# Altium PCB RX_Board.PcbDoc (part 3 of 5)
Units mm, origin at the board's own origin, x right, y up, seen from the top; angles counter-clockwise.
Board outline 69 x 69 mm, 4 copper layers (Top Layer, Int1 (GND), Int2 (GND), Bottom Layer), stack 1.586 mm thick; 118 components, 59 nets, 325 pads, 477 vias.
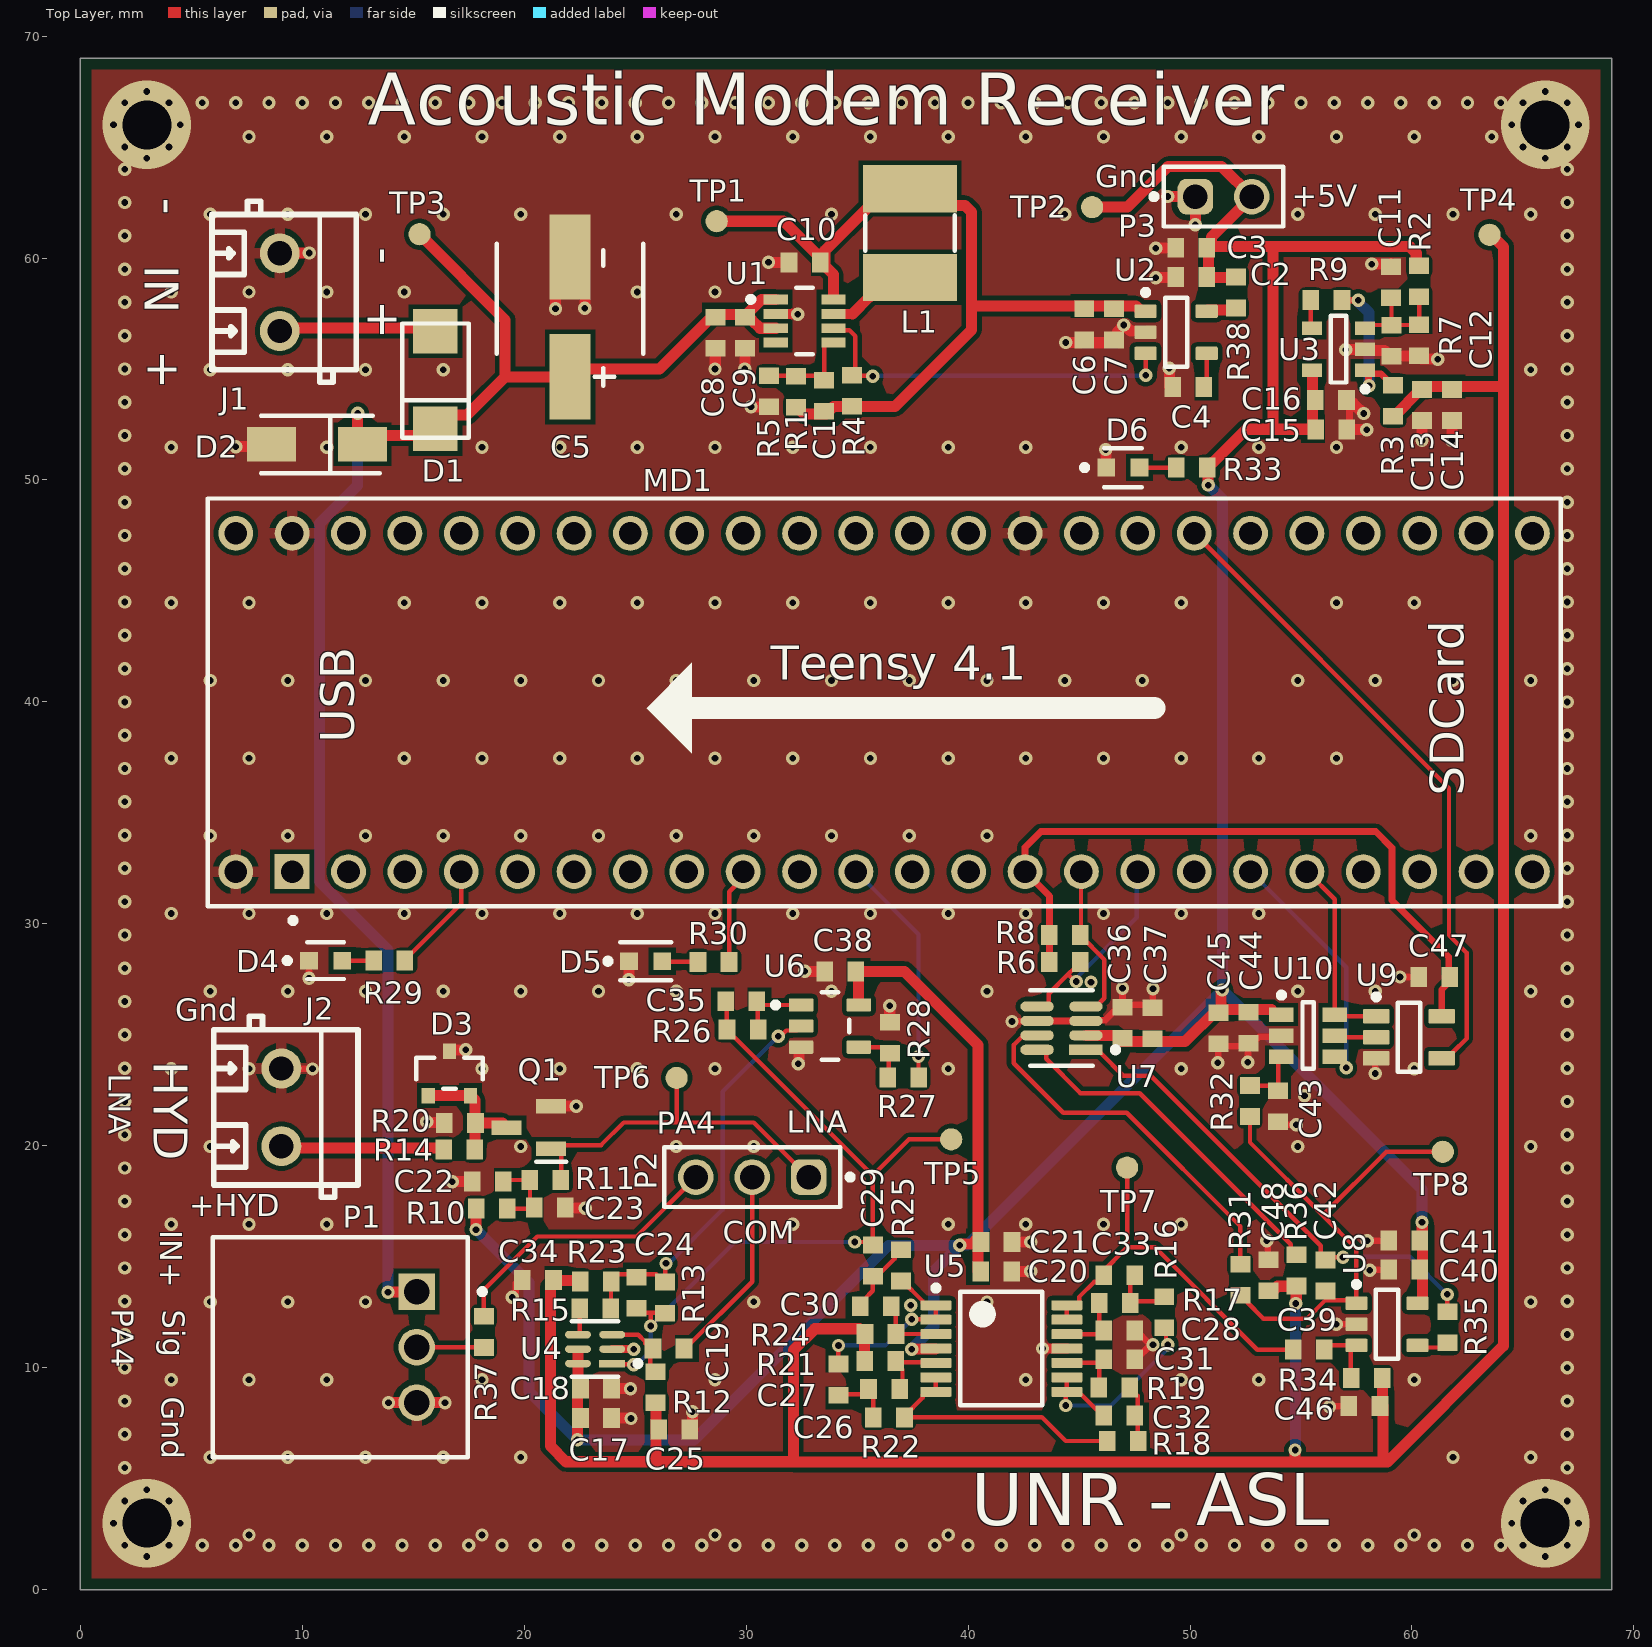
[diagram p0: Top Layer view]

## Part data (continued)
R1: library part RT0603BRD07560KL, "100mW Thin Film Resistor 75V ±25ppm/℃ ±0.1% 560kΩ 0603 Chip Resistor - Surface Mount ROHS", Case Code (Imperial)=0603, Case Code (Metric)=1608, JLCPCB Part Number=C719312, Manufacturer="Yageo Group", Max Operating Temperature=155°C, Max Power Dissipation=100mW, Min Operating Temperature=-55°C, Temperature Coefficient=25ppm/°C, Tolerance=0.1%, Voltage Rating=75V, Case/Package=0603, Category="Chip SMD Resistors", China RoHS=Non-Compliant, ComponentLink1Description=https://datasheet.octopart.com:443/RT0603BRD07560KL-Yageo-datasheet-176402239.pdf?src-supplier=Future+Electronics, ComponentLink1URL=https://datasheet.octopart.com:443/RT0603BRD07560KL-Yageo-datasheet-176402239.pdf?src-supplier=Future+Electronics, ComponentLink2Description=https://datasheet.octopart.com:443/RT0603BRD07560KL-Yageo-datasheet-169971040.pdf?src-supplier=Future+Electronics, ComponentLink2URL=https://datasheet.octopart.com:443/RT0603BRD07560KL-Yageo-datasheet-169971040.pdf?src-supplier=Future+Electronics, ComponentLink3Description=https://datasheet.octopart.com:443/RT0603BRD07560KL-Yageo-datasheet-166250672.pdf?src-supplier=Future+Electronics, ComponentLink3URL=https://datasheet.octopart.com:443/RT0603BRD07560KL-Yageo-datasheet-166250672.pdf?src-supplier=Future+Electronics, ComponentLink4Description=https://datasheet.octopart.com:443/RT0603BRD07560KL-Yageo-datasheet-96443642.pdf?src-supplier=Upverter, ComponentLink4URL=https://datasheet.octopart.com:443/RT0603BRD07560KL-Yageo-datasheet-96443642.pdf?src-supplier=Upverter, ComponentLink5Description=https://datasheet.octopart.com:443/RT0603BRD07560KL-Yageo-Group-datasheet-141265893.pdf?src-supplier=ODG+(Origin+Data+Global), ComponentLink5URL=https://datasheet.octopart.com:443/RT0603BRD07560KL-Yageo-Group-datasheet-141265893.pdf?src-supplier=ODG+(Origin+Data+Global), ComponentLink6Description=https://datasheet.octopart.com/RT0603BRD07560KL-Yageo-datasheet-86813807.pdf, ComponentLink6URL=https://datasheet.octopart.com/RT0603BRD07560KL-Yageo-datasheet-86813807.pdf, ComponentLink7Description=http://sigma.octopart.com:80/conflict_mineral_statement/Yageo-company-3.pdf?src-supplier=Compliance+Statements, ComponentLink7URL=http://sigma.octopart.com:80/conflict_mineral_statement/Yageo-company-3.pdf?src-supplier=Compliance+Statements, ComponentLink8Description=http://sigma.octopart.com:80/rohs_statement/Yageo-company-2.pdf?src-supplier=Compliance+Statements, ComponentLink8URL=http://sigma.octopart.com:80/rohs_statement/Yageo-company-2.pdf?src-supplier=Compliance+Statements, Composition="Thin Film", Contact Plating=Tin, Country of Origin="Mainland China, Taiwan", Export Control Classification Number (ECCN) Code=EAR99, Features="Moisture Resistant", Harmonized Tariff Schedule (HTS) Code=8533.21.00.30, Height=450µm, Introduction Date=2008-07-11, Length=1.6mm, Lifecycle Status=Production, Manufacturer Part Number=RT0603BRD07560KL, Mounting Technology="Surface Mount", Number of Terminals=2, Number of Terminations=2, Packaging="Tape & Reel", Power Rating=100mW, Pricing="10=0.061, 20=0.06, 30=0.059, 50=0.058, 100=0.057, 250=0.054, 500=0.051, 1000=0.05 (USD)", Radiation Hardening=No, REACH SVHC=Unaffected, RoHS=Compliant, Schedule B="8533210045, 8533210045|8533210045|8533210045|8533210045|8533210045", Stock=4440, Supplier=Newark, Supplier Part Number=RT0603BRD07560KL, Termination=SMD/SMT, Width=800µm, Working Voltage=75V
R2 R7 R12 R34 R35: library part RT0603BRD0710KL, "Res Thin Film 0603 10K Ohm 0.1% 1/10W", Case Code (Imperial)=0603, JLCPCB Part Number=C95204, Manufacturer="Yageo Group", Max Operating Temperature=155°C, Max Power Dissipation=100mW, Min Operating Temperature=-55°C, Temperature Coefficient=25ppm/°C, Tolerance=0.1%, Voltage Rating=75V, Case/Package=0603, Category="Chip SMD Resistors", China RoHS=Non-Compliant, ComponentLink1Description=https://datasheet.octopart.com:443/RT0603BRD0710KL-Yageo-datasheet-176402239.pdf?src-supplier=Future+Electronics, ComponentLink1URL=https://datasheet.octopart.com:443/RT0603BRD0710KL-Yageo-datasheet-176402239.pdf?src-supplier=Future+Electronics, ComponentLink2Description=https://datasheet.octopart.com:443/RT0603BRD0710KL-Yageo-datasheet-169971040.pdf?src-supplier=Future+Electronics, ComponentLink2URL=https://datasheet.octopart.com:443/RT0603BRD0710KL-Yageo-datasheet-169971040.pdf?src-supplier=Future+Electronics, ComponentLink3Description=https://datasheet.octopart.com:443/RT0603BRD0710KL-Yageo-datasheet-166250672.pdf?src-supplier=Future+Electronics, ComponentLink3URL=https://datasheet.octopart.com:443/RT0603BRD0710KL-Yageo-datasheet-166250672.pdf?src-supplier=Future+Electronics, ComponentLink4Description=https://datasheet.octopart.com:443/RT0603BRD0710KL-Yageo-datasheet-136673517.pdf?src-supplier=Future+Electronics, ComponentLink4URL=https://datasheet.octopart.com:443/RT0603BRD0710KL-Yageo-datasheet-136673517.pdf?src-supplier=Future+Electronics, ComponentLink5Description=https://datasheet.octopart.com:443/RT0603BRD0710KL-Yageo-datasheet-137700930.pdf?src-supplier=Future+Electronics, ComponentLink5URL=https://datasheet.octopart.com:443/RT0603BRD0710KL-Yageo-datasheet-137700930.pdf?src-supplier=Future+Electronics, ComponentLink6Description=https://datasheet.octopart.com:443/RT0603BRD0710KL-Yageo-datasheet-12594463.pdf?src-supplier=Future+Electronics, ComponentLink6URL=https://datasheet.octopart.com:443/RT0603BRD0710KL-Yageo-datasheet-12594463.pdf?src-supplier=Future+Electronics, ComponentLink7Description=https://datasheet.octopart.com:443/RT0603BRD0710KL-Yageo-datasheet-8324589.pdf?src-supplier=Future+Electronics, ComponentLink7URL=https://datasheet.octopart.com:443/RT0603BRD0710KL-Yageo-datasheet-8324589.pdf?src-supplier=Future+Electronics, ComponentLink8Description=https://datasheet.octopart.com:443/RT0603BRD0710KL-Yageo-datasheet-34924148.pdf?src-supplier=Future+Electronics, ComponentLink8URL=https://datasheet.octopart.com:443/RT0603BRD0710KL-Yageo-datasheet-34924148.pdf?src-supplier=Future+Electronics, ComponentLink9Description=https://datasheet.octopart.com:443/RT0603BRD0710KL-Yageo-datasheet-10915759.pdf?src-supplier=Upverter, ComponentLink9URL=https://datasheet.octopart.com:443/RT0603BRD0710KL-Yageo-datasheet-10915759.pdf?src-supplier=Upverter, ComponentLink10Description=https://datasheet.octopart.com:443/RT0603BRD0710KL-Yageo-datasheet-96443642.pdf?src-supplier=Upverter, ComponentLink10URL=https://datasheet.octopart.com:443/RT0603BRD0710KL-Yageo-datasheet-96443642.pdf?src-supplier=Upverter, ComponentLink11Description=https://datasheet.octopart.com:443/RT0603BRD0710KL-Yageo-Group-datasheet-188167888.pdf?src-supplier=LCSC, ComponentLink11URL=https://datasheet.octopart.com:443/RT0603BRD0710KL-Yageo-Group-datasheet-188167888.pdf?src-supplier=LCSC, ComponentLink12Description=https://datasheet.octopart.com:443/RT0603BRD0710KL-Yageo-datasheet-164439670.pdf?src-supplier=Newark, ComponentLink12URL=https://datasheet.octopart.com:443/RT0603BRD0710KL-Yageo-datasheet-164439670.pdf?src-supplier=Newark, ComponentLink13Description=https://datasheet.octopart.com:443/RT0603BRD0710KL-Yageo-Group-datasheet-141265893.pdf?src-supplier=ODG+(Origin+Data+Global), ComponentLink13URL=https://datasheet.octopart.com:443/RT0603BRD0710KL-Yageo-Group-datasheet-141265893.pdf?src-supplier=ODG+(Origin+Data+Global), ComponentLink14Description=https://datasheet.octopart.com:443/RT0603BRD0710KL-Yageo-datasheet-120102479.pdf?src-supplier=Megastar, ComponentLink14URL=https://datasheet.octopart.com:443/RT0603BRD0710KL-Yageo-datasheet-120102479.pdf?src-supplier=Megastar, ComponentLink15Description=https://datasheet.octopart.com/RT0603BRD0710KL-Yageo-datasheet-86813807.pdf, ComponentLink15URL=https://datasheet.octopart.com/RT0603BRD0710KL-Yageo-datasheet-86813807.pdf, ComponentLink16Description=http://sigma.octopart.com:80/conflict_mineral_statement/Yageo-company-3.pdf?src-supplier=Compliance+Statements, ComponentLink16URL=http://sigma.octopart.com:80/conflict_mineral_statement/Yageo-company-3.pdf?src-supplier=Compliance+Statements, ComponentLink17Description=http://sigma.octopart.com:80/rohs_statement/Yageo-company-2.pdf?src-supplier=Compliance+Statements, ComponentLink17URL=http://sigma.octopart.com:80/rohs_statement/Yageo-company-2.pdf?src-supplier=Compliance+Statements, Composition="Thin Film", Country of Origin="Mainland China, Taiwan", Depth=800µm, Export Control Classification Number (ECCN) Code=EAR99, Features="Moisture Resistant", Harmonized Tariff Schedule (HTS) Code=8533.21.00.30, Height=450µm, Introduction Date=2008-06-09, Lead Free="Lead Free", Length=1.6mm, Lifecycle Status=Production, Manufacturer Part Number=RT0603BRD0710KL, Military Standard=Not, Mounting Technology="Surface Mount", Number of Terminals=2, Number of Terminations=2, Power Rating=100mW, Pricing="1=0.127, 25=0.079, 100=0.075, 250=0.07, 500=0.066, 1000=0.064, 2500=0.059 (USD)", REACH SVHC=Unaffected, RoHS=Compliant, Schedule B="8533210045, 8533210045|8533210045, 8533210045|8533210045|8533210045, 8533210045|8533210045|8533210045|8533210045", Stock=34896, Supplier=Avnet, Supplier Part Number=RT0603BRD0710KL, Termination=SMD/SMT, Voltage Rating (DC)=75V, Weight=2.012816mg, Width=800µm, Working Voltage=75V
R3: library part 0603WAF100JT5E, "Res Thick Film 0603 10 Ohm 1% 0.1W(1/10W) ±200ppm/C Pad SMD T/R", JLCPCB Part Number=C22859, Manufacturer="Royal Ohm", Supplier Part Number=303-0603WAF100JT5E, Category="Chip SMD Resistors", ComponentLink1Description=https://datasheet.octopart.com:443/0603WAF100JT5E-Royal-Ohm-datasheet-165785611.pdf?src-supplier=TME, ComponentLink1URL=https://datasheet.octopart.com:443/0603WAF100JT5E-Royal-Ohm-datasheet-165785611.pdf?src-supplier=TME, ComponentLink2Description=https://datasheet.octopart.com:443/0603WAF100JT5E-Royal-Ohm-datasheet-157855877.pdf?src-supplier=TME, ComponentLink2URL=https://datasheet.octopart.com:443/0603WAF100JT5E-Royal-Ohm-datasheet-157855877.pdf?src-supplier=TME, ComponentLink3Description=https://datasheet.octopart.com:443/0603WAF100JT5E-Royal-Ohm-datasheet-62069544.pdf?src-supplier=TME, ComponentLink3URL=https://datasheet.octopart.com:443/0603WAF100JT5E-Royal-Ohm-datasheet-62069544.pdf?src-supplier=TME, Manufacturer Part Number=0603WAF100JT5E, Pricing="10000=0.001 (USD)", Stock=15000, Supplier=Mouser
R4 R5 R20 R28: library part RT0603BRD07100KL, "100mW Thin Film Resistor 75V ±25ppm/℃ ±0.1% 100kΩ 0603 Chip Resistor - Surface Mount ROHS", Case Code (Imperial)=0603, JLCPCB Part Number=C122538, Manufacturer="Yageo Group", Max Operating Temperature=155°C, Max Power Dissipation=100mW, Min Operating Temperature=-55°C, Temperature Coefficient=25ppm/°C, Tolerance=0.1%, Voltage Rating=75V, Case/Package=0603, Category="Chip SMD Resistors", China RoHS=Non-Compliant, ComponentLink1Description=https://datasheet.octopart.com:443/RT0603BRD07100KL-Yageo-datasheet-176402239.pdf?src-supplier=Future+Electronics, ComponentLink1URL=https://datasheet.octopart.com:443/RT0603BRD07100KL-Yageo-datasheet-176402239.pdf?src-supplier=Future+Electronics, ComponentLink2Description=https://datasheet.octopart.com:443/RT0603BRD07100KL-Yageo-datasheet-169971040.pdf?src-supplier=Future+Electronics, ComponentLink2URL=https://datasheet.octopart.com:443/RT0603BRD07100KL-Yageo-datasheet-169971040.pdf?src-supplier=Future+Electronics, ComponentLink3Description=https://datasheet.octopart.com:443/RT0603BRD07100KL-Yageo-datasheet-166250672.pdf?src-supplier=Future+Electronics, ComponentLink3URL=https://datasheet.octopart.com:443/RT0603BRD07100KL-Yageo-datasheet-166250672.pdf?src-supplier=Future+Electronics, ComponentLink4Description=https://datasheet.octopart.com:443/RT0603BRD07100KL-Yageo-datasheet-136673517.pdf?src-supplier=Future+Electronics, ComponentLink4URL=https://datasheet.octopart.com:443/RT0603BRD07100KL-Yageo-datasheet-136673517.pdf?src-supplier=Future+Electronics, ComponentLink5Description=https://datasheet.octopart.com:443/RT0603BRD07100KL-Yageo-datasheet-137700930.pdf?src-supplier=Future+Electronics, ComponentLink5URL=https://datasheet.octopart.com:443/RT0603BRD07100KL-Yageo-datasheet-137700930.pdf?src-supplier=Future+Electronics, ComponentLink6Description=https://datasheet.octopart.com:443/RT0603BRD07100KL-Yageo-datasheet-41589729.pdf?src-supplier=Future+Electronics, ComponentLink6URL=https://datasheet.octopart.com:443/RT0603BRD07100KL-Yageo-datasheet-41589729.pdf?src-supplier=Future+Electronics, ComponentLink7Description=https://datasheet.octopart.com:443/RT0603BRD07100KL-Yageo-datasheet-12594463.pdf?src-supplier=Future+Electronics, ComponentLink7URL=https://datasheet.octopart.com:443/RT0603BRD07100KL-Yageo-datasheet-12594463.pdf?src-supplier=Future+Electronics, ComponentLink8Description=https://datasheet.octopart.com:443/RT0603BRD07100KL-Yageo-datasheet-34924148.pdf?src-supplier=Future+Electronics, ComponentLink8URL=https://datasheet.octopart.com:443/RT0603BRD07100KL-Yageo-datasheet-34924148.pdf?src-supplier=Future+Electronics, ComponentLink9Description=https://datasheet.octopart.com:443/RT0603BRD07100KL-Yageo-datasheet-96443642.pdf?src-supplier=Upverter, ComponentLink9URL=https://datasheet.octopart.com:443/RT0603BRD07100KL-Yageo-datasheet-96443642.pdf?src-supplier=Upverter, ComponentLink10Description=https://datasheet.octopart.com:443/RT0603BRD07100KL-Yageo-datasheet-10915759.pdf?src-supplier=Burklin+Elektronik, ComponentLink10URL=https://datasheet.octopart.com:443/RT0603BRD07100KL-Yageo-datasheet-10915759.pdf?src-supplier=Burklin+Elektronik, ComponentLink11Description=https://datasheet.octopart.com:443/RT0603BRD07100KL-Yageo-Group-datasheet-141265893.pdf?src-supplier=ODG+(Origin+Data+Global), ComponentLink11URL=https://datasheet.octopart.com:443/RT0603BRD07100KL-Yageo-Group-datasheet-141265893.pdf?src-supplier=ODG+(Origin+Data+Global), ComponentLink12Description=https://datasheet.octopart.com/RT0603BRD07100KL-Yageo-datasheet-86813807.pdf, ComponentLink12URL=https://datasheet.octopart.com/RT0603BRD07100KL-Yageo-datasheet-86813807.pdf, ComponentLink13Description=http://sigma.octopart.com:80/conflict_mineral_statement/Yageo-company-3.pdf?src-supplier=Compliance+Statements, ComponentLink13URL=http://sigma.octopart.com:80/conflict_mineral_statement/Yageo-company-3.pdf?src-supplier=Compliance+Statements, ComponentLink14Description=http://sigma.octopart.com:80/rohs_statement/Yageo-company-2.pdf?src-supplier=Compliance+Statements, ComponentLink14URL=http://sigma.octopart.com:80/rohs_statement/Yageo-company-2.pdf?src-supplier=Compliance+Statements, Composition="Thin Film", Contact Plating=Tin, Country of Origin="Mainland China, Taiwan", Depth=800µm, Export Control Classification Number (ECCN) Code=EAR99, Features="Moisture Resistant", Harmonized Tariff Schedule (HTS) Code=8533.21.00.30, Height=450µm, Introduction Date=2008-06-09, Lead Free="Lead Free", Length=1.6mm, Lifecycle Status=Production, Manufacturer Part Number=RT0603BRD07100KL, Military Standard=Not, Mounting Technology="Surface Mount", Number of Terminals=2, Number of Terminations=2, Power Rating=100mW, Pricing="5000=0.0291, 10000=0.02828, 20000=0.02751, 40000=0.02677, 80000=0.02608 (USD)", Radiation Hardening=No, REACH SVHC=Unaffected, RoHS=Compliant, Schedule B="8533210045, 8533210045|8533210045, 8533210045|8533210045|8533210045, 8533210045|8533210045|8533210045|8533210045", Stock=535000, Supplier=Avnet, Supplier Part Number=RT0603BRD07100KL, Termination=SMD/SMT, Voltage Rating (DC)=75V, Width=800µm, Working Voltage=75V
R6 R8 R9 R31: library part RC0603FR-074K7L, "Yageo RC0603FR-074K7L Resistor 0603 SMD 4.7k Ohm 1% 100mW Thick Film", Case Code (Imperial)=0603, JLCPCB Part Number=C99782, Manufacturer="Yageo Group", Max Operating Temperature=155°C, Min Operating Temperature=-55°C, Power Rating=100mW, Temperature Coefficient=100ppm/°C, Tolerance=1%, Voltage Rating=75V, Voltage Rating (DC)=50V, Case/Package=0603, Category="Chip SMD Resistors", China RoHS=Non-Compliant, ComponentLink1Description=https://datasheet.octopart.com:443/RC0603FR-074K7L-Yageo-datasheet-175887523.pdf?src-supplier=IHS, ComponentLink1URL=https://datasheet.octopart.com:443/RC0603FR-074K7L-Yageo-datasheet-175887523.pdf?src-supplier=IHS, ComponentLink2Description=https://datasheet.octopart.com:443/RC0603FR-074K7L-Yageo-datasheet-103092701.pdf?src-supplier=Upverter, ComponentLink2URL=https://datasheet.octopart.com:443/RC0603FR-074K7L-Yageo-datasheet-103092701.pdf?src-supplier=Upverter, ComponentLink3Description=https://datasheet.octopart.com:443/RC0603FR-074K7L-Yageo-datasheet-8328172.pdf?src-supplier=Farnell, ComponentLink3URL=https://datasheet.octopart.com:443/RC0603FR-074K7L-Yageo-datasheet-8328172.pdf?src-supplier=Farnell, ComponentLink4Description=https://datasheet.octopart.com:443/RC0603FR-074K7L-Yageo-datasheet-13691069.pdf?src-supplier=Farnell, ComponentLink4URL=https://datasheet.octopart.com:443/RC0603FR-074K7L-Yageo-datasheet-13691069.pdf?src-supplier=Farnell, ComponentLink5Description=https://datasheet.octopart.com:443/RC0603FR-074K7L-Yageo-Group-datasheet-190305687.pdf?src-supplier=Future+Electronics, ComponentLink5URL=https://datasheet.octopart.com:443/RC0603FR-074K7L-Yageo-Group-datasheet-190305687.pdf?src-supplier=Future+Electronics, ComponentLink6Description=https://datasheet.octopart.com:443/RC0603FR-074K7L-Yageo-datasheet-164759695.pdf?src-supplier=Future+Electronics, ComponentLink6URL=https://datasheet.octopart.com:443/RC0603FR-074K7L-Yageo-datasheet-164759695.pdf?src-supplier=Future+Electronics, ComponentLink7Description=https://datasheet.octopart.com:443/RC0603FR-074K7L-Yageo-datasheet-137700087.pdf?src-supplier=Future+Electronics, ComponentLink7URL=https://datasheet.octopart.com:443/RC0603FR-074K7L-Yageo-datasheet-137700087.pdf?src-supplier=Future+Electronics, ComponentLink8Description=https://datasheet.octopart.com:443/RC0603FR074K7L-Yageo-datasheet-27584510.pdf?src-supplier=Future+Electronics, ComponentLink8URL=https://datasheet.octopart.com:443/RC0603FR074K7L-Yageo-datasheet-27584510.pdf?src-supplier=Future+Electronics, ComponentLink9Description=https://datasheet.octopart.com:443/RC0603FR-074K7L-Yageo-datasheet-15599030.pdf?src-supplier=Future+Electronics, ComponentLink9URL=https://datasheet.octopart.com:443/RC0603FR-074K7L-Yageo-datasheet-15599030.pdf?src-supplier=Future+Electronics, ComponentLink10Description=https://datasheet.octopart.com:443/RC0603FR-074K7L-Yageo-datasheet-175423674.pdf?src-supplier=Newark, ComponentLink10URL=https://datasheet.octopart.com:443/RC0603FR-074K7L-Yageo-datasheet-175423674.pdf?src-supplier=Newark, ComponentLink11Description=https://datasheet.octopart.com:443/RC0603FR-074K7L-Yageo-datasheet-12596169.pdf?src-supplier=Newark, ComponentLink11URL=https://datasheet.octopart.com:443/RC0603FR-074K7L-Yageo-datasheet-12596169.pdf?src-supplier=Newark, ComponentLink12Description=https://datasheet.octopart.com:443/RC0603FR-074K7L-Yageo-datasheet-503470.pdf?src-supplier=Newark, ComponentLink12URL=https://datasheet.octopart.com:443/RC0603FR-074K7L-Yageo-datasheet-503470.pdf?src-supplier=Newark, ComponentLink13Description=https://datasheet.octopart.com:443/RC0603FR-074K7L-Yageo-datasheet-34211833.pdf?src-supplier=element14+APAC, ComponentLink13URL=https://datasheet.octopart.com:443/RC0603FR-074K7L-Yageo-datasheet-34211833.pdf?src-supplier=element14+APAC, ComponentLink14Description=https://datasheet.octopart.com:443/RC0603FR-074K7L-Yageo-datasheet-62067350.pdf?src-supplier=element14+APAC, ComponentLink14URL=https://datasheet.octopart.com:443/RC0603FR-074K7L-Yageo-datasheet-62067350.pdf?src-supplier=element14+APAC, ComponentLink15Description=https://datasheet.octopart.com:443/RC0603FR-074K7L-Yageo-datasheet-17842380.pdf?src-supplier=element14+APAC, ComponentLink15URL=https://datasheet.octopart.com:443/RC0603FR-074K7L-Yageo-datasheet-17842380.pdf?src-supplier=element14+APAC, ComponentLink16Description=https://datasheet.octopart.com:443/RC0603FR-074K7L-Yageo-Group-datasheet-189192902.pdf?src-supplier=LCSC, ComponentLink16URL=https://datasheet.octopart.com:443/RC0603FR-074K7L-Yageo-Group-datasheet-189192902.pdf?src-supplier=LCSC, ComponentLink17Description=https://datasheet.octopart.com:443/RC0603FR-074K7L-Yageo-datasheet-79472498.pdf?src-supplier=Megastar, ComponentLink17URL=https://datasheet.octopart.com:443/RC0603FR-074K7L-Yageo-datasheet-79472498.pdf?src-supplier=Megastar, ComponentLink18Description=https://datasheet.octopart.com/RC0603FR-074K7L-Yageo-datasheet-73766026.pdf, ComponentLink18URL=https://datasheet.octopart.com/RC0603FR-074K7L-Yageo-datasheet-73766026.pdf, ComponentLink19Description=https://datasheet.octopart.com:443/RC0603FR-074K7L-Yageo-datasheet-118562.pdf?src-supplier=DigiKey, ComponentLink19URL=https://datasheet.octopart.com:443/RC0603FR-074K7L-Yageo-datasheet-118562.pdf?src-supplier=DigiKey, ComponentLink20Description=http://sigma.octopart.com:80/conflict_mineral_statement/Yageo-company-3.pdf?src-supplier=Compliance+Statements, ComponentLink20URL=http://sigma.octopart.com:80/conflict_mineral_statement/Yageo-company-3.pdf?src-supplier=Compliance+Statements, ComponentLink21Description=http://sigma.octopart.com:80/rohs_statement/Yageo-company-2.pdf?src-supplier=Compliance+Statements, ComponentLink21URL=http://sigma.octopart.com:80/rohs_statement/Yageo-company-2.pdf?src-supplier=Compliance+Statements, Composition="Thick Film", Contact Plating=Tin, Country of Origin="Mainland China, Taiwan", Depth=800µm, Export Control Classification Number (ECCN) Code=EAR99, Harmonized Tariff Schedule (HTS) Code=8533.21.00.30, Height=450µm, Introduction Date=2004-09-22, Lead Free="Lead Free", Lead Pitch=300µm, Length=1.6mm, Lifecycle Status=Production, Manufacturer Part Number=RC0603FR-074K7L, Military Standard=Not, Mounting Technology="Surface Mount", Number of Terminals=2, Packaging="Tape & Reel", Pins=2, Pricing="10=0.018, 20=0.016, 30=0.015, 50=0.013, 100=0.012, 250=0.011, 500=0.010, 1000=0.009 (USD)", Radiation Hardening=No, REACH SVHC=Unaffected, RoHS=Compliant, Schedule B="8533210045, 8533210045|8533210045|8533210045|8533210045|8533210045|8533210045|8533210045|8533210045|8533210045|8533210045|8533210045|8533210045|8533210045|8533210045|8533210045|8533210045|8533210045|8533210045|8533210045|8533210045|8533210045|8533210045|8533210045|85", Stock=339015, Supplier=Newark, Supplier Part Number=RC0603FR-074K7L, Termination=SMD/SMT, Width=800µm, Working Voltage=75V
R10: library part 0603WAF220JT5E, "Thick Film Resistors - SMD RMC 0603 1/10W 1% T/R-5000", JLCPCB Part Number=C23345, Manufacturer="Royal Ohm", Supplier Part Number=303-0603WAF220JT5E, Category="Chip SMD Resistors", ComponentLink1Description=https://datasheet.octopart.com:443/0603WAF220JT5E-Royal-Ohm-datasheet-165785611.pdf?src-supplier=TME, ComponentLink1URL=https://datasheet.octopart.com:443/0603WAF220JT5E-Royal-Ohm-datasheet-165785611.pdf?src-supplier=TME, ComponentLink2Description=https://datasheet.octopart.com:443/0603WAF220JT5E-Royal-Ohm-datasheet-157855877.pdf?src-supplier=TME, ComponentLink2URL=https://datasheet.octopart.com:443/0603WAF220JT5E-Royal-Ohm-datasheet-157855877.pdf?src-supplier=TME, ComponentLink3Description=https://datasheet.octopart.com:443/0603WAF220JT5E-Royal-Ohm-datasheet-62069544.pdf?src-supplier=TME, ComponentLink3URL=https://datasheet.octopart.com:443/0603WAF220JT5E-Royal-Ohm-datasheet-62069544.pdf?src-supplier=TME, Manufacturer Part Number=0603WAF220JT5E, Pricing="10000=0.001 (USD)", Supplier=Mouser
R11: library part 0603WAF5100T5E, "Res Thick Film 0603 510 Ohm 1% 0.1W(1/10W) ±100ppm/C Pad SMD T/R", JLCPCB Part Number=C23193, Manufacturer="Royal Ohm", Supplier Part Number=303-0603WAF5100T5E, Category="Chip SMD Resistors", ComponentLink1Description=https://datasheet.octopart.com:443/0603WAF5100T5E-Royal-Ohm-datasheet-165785611.pdf?src-supplier=TME, ComponentLink1URL=https://datasheet.octopart.com:443/0603WAF5100T5E-Royal-Ohm-datasheet-165785611.pdf?src-supplier=TME, ComponentLink2Description=https://datasheet.octopart.com:443/0603WAF5100T5E-Royal-Ohm-datasheet-157855877.pdf?src-supplier=TME, ComponentLink2URL=https://datasheet.octopart.com:443/0603WAF5100T5E-Royal-Ohm-datasheet-157855877.pdf?src-supplier=TME, ComponentLink3Description=https://datasheet.octopart.com:443/0603WAF5100T5E-Royal-Ohm-datasheet-62069544.pdf?src-supplier=TME, ComponentLink3URL=https://datasheet.octopart.com:443/0603WAF5100T5E-Royal-Ohm-datasheet-62069544.pdf?src-supplier=TME, Manufacturer Part Number=0603WAF5100T5E, Pricing="10000=0.001 (USD)", Supplier=Mouser
R13: library part 0603WAF4702T5E, "Res Thick Film 0603 47K Ohm 1% 0.1W(1/10W) ±100ppm/C Pad SMD T/R", Case/Package=0603, JLCPCB Part Number=C25819, Manufacturer="Royal Ohm", Max Operating Temperature=155°C, Min Operating Temperature=-55°C, Power Rating=100mW, Supplier Part Number=303-0603WAF4702T5E, Temperature Coefficient=100ppm/°C, Tolerance=1%, Working Voltage=75V, Category="Chip SMD Resistors", China RoHS=Non-Compliant, ComponentLink1Description=https://datasheet.octopart.com:443/0603WAF4702T5E-Royal-Ohm-datasheet-157855877.pdf?src-supplier=IHS, ComponentLink1URL=https://datasheet.octopart.com:443/0603WAF4702T5E-Royal-Ohm-datasheet-157855877.pdf?src-supplier=IHS, ComponentLink2Description=https://datasheet.octopart.com:443/0603WAF4702T5E-Royal-Ohm-datasheet-165785611.pdf?src-supplier=TME, ComponentLink2URL=https://datasheet.octopart.com:443/0603WAF4702T5E-Royal-Ohm-datasheet-165785611.pdf?src-supplier=TME, ComponentLink3Description=https://datasheet.octopart.com:443/0603WAF4702T5E-Royal-Ohm-datasheet-62069544.pdf?src-supplier=TME, ComponentLink3URL=https://datasheet.octopart.com:443/0603WAF4702T5E-Royal-Ohm-datasheet-62069544.pdf?src-supplier=TME, Country of Origin=Thailand, Export Control Classification Number (ECCN) Code=EAR99, Harmonized Tariff Schedule (HTS) Code=8533.21.00.30, Introduction Date=2016-08-18, Lifecycle Status=Production, Manufacturer Part Number=0603WAF4702T5E, Mounting Technology="Surface Mount", Number of Terminals=2, Pricing="10000=0.001 (USD)", REACH SVHC=Unaffected, RoHS=Compliant, Stock=65000, Supplier=Mouser
R14 R32: library part 0603WAF1000T5E, "Res Thick Film 0603 100 Ohm 1% 0.1W(1/10W) ±200ppm/C Pad SMD T/R", JLCPCB Part Number=C22775, Manufacturer="Royal Ohm", Supplier Part Number=303-0603WAF1000T5E, Category="Chip SMD Resistors", ComponentLink1Description=https://datasheet.octopart.com:443/0603WAF1000T5E-Royal-Ohm-datasheet-165785611.pdf?src-supplier=TME, ComponentLink1URL=https://datasheet.octopart.com:443/0603WAF1000T5E-Royal-Ohm-datasheet-165785611.pdf?src-supplier=TME, ComponentLink2Description=https://datasheet.octopart.com:443/0603WAF1000T5E-Royal-Ohm-datasheet-157855877.pdf?src-supplier=TME, ComponentLink2URL=https://datasheet.octopart.com:443/0603WAF1000T5E-Royal-Ohm-datasheet-157855877.pdf?src-supplier=TME, ComponentLink3Description=https://datasheet.octopart.com:443/0603WAF1000T5E-Royal-Ohm-datasheet-62069544.pdf?src-supplier=TME, ComponentLink3URL=https://datasheet.octopart.com:443/0603WAF1000T5E-Royal-Ohm-datasheet-62069544.pdf?src-supplier=TME, Manufacturer Part Number=0603WAF1000T5E, Pricing="10000=0.001 (USD)", Supplier=Mouser
R15: library part 0603WAF9101T5E, "100mW Thick Film Resistors 75V ±100ppm/℃ ±1% 9.1kΩ 0603 Chip Resistor - Surface Mount ROHS", JLCPCB Part Number=C23260, Manufacturer="Royal Ohm", Supplier Part Number=303-0603WAF9101T5E, Category="Chip SMD Resistors", ComponentLink1Description=https://datasheet.octopart.com:443/0603WAF9101T5E-Royal-Ohm-datasheet-165785611.pdf?src-supplier=TME, ComponentLink1URL=https://datasheet.octopart.com:443/0603WAF9101T5E-Royal-Ohm-datasheet-165785611.pdf?src-supplier=TME, ComponentLink2Description=https://datasheet.octopart.com:443/0603WAF9101T5E-Royal-Ohm-datasheet-157855877.pdf?src-supplier=TME, ComponentLink2URL=https://datasheet.octopart.com:443/0603WAF9101T5E-Royal-Ohm-datasheet-157855877.pdf?src-supplier=TME, ComponentLink3Description=https://datasheet.octopart.com:443/0603WAF9101T5E-Royal-Ohm-datasheet-62069544.pdf?src-supplier=TME, ComponentLink3URL=https://datasheet.octopart.com:443/0603WAF9101T5E-Royal-Ohm-datasheet-62069544.pdf?src-supplier=TME, Manufacturer Part Number=0603WAF9101T5E, Pricing="10000=0.001 (USD)", Stock=90000, Supplier=Mouser
R16 R17 R18 R19: library part 0603WAF1501T5E, "Res Thick Film 0603 1.5K Ohm 1% 0.1W(1/10W) ±100ppm/C Pad SMD T/R", Case/Package=0603, JLCPCB Part Number=C22843, Manufacturer="Royal Ohm", Max Operating Temperature=155°C, Min Operating Temperature=-55°C, Power Rating=100mW, Supplier Part Number=303-0603WAF1501T5E, Temperature Coefficient=100ppm/°C, Tolerance=1%, Working Voltage=75V, Category="Chip SMD Resistors", China RoHS=Non-Compliant, ComponentLink1Description=https://datasheet.octopart.com:443/0603WAF1501T5E-Royal-Electronics-datasheet-181080982.pdf?src-supplier=IHS, ComponentLink1URL=https://datasheet.octopart.com:443/0603WAF1501T5E-Royal-Electronics-datasheet-181080982.pdf?src-supplier=IHS, ComponentLink2Description=https://datasheet.octopart.com:443/0603WAF1501T5E-Royal-Ohm-datasheet-165785611.pdf?src-supplier=TME, ComponentLink2URL=https://datasheet.octopart.com:443/0603WAF1501T5E-Royal-Ohm-datasheet-165785611.pdf?src-supplier=TME, ComponentLink3Description=https://datasheet.octopart.com:443/0603WAF1501T5E-Royal-Ohm-datasheet-157855877.pdf?src-supplier=TME, ComponentLink3URL=https://datasheet.octopart.com:443/0603WAF1501T5E-Royal-Ohm-datasheet-157855877.pdf?src-supplier=TME, ComponentLink4Description=https://datasheet.octopart.com:443/0603WAF1501T5E-Royal-Ohm-datasheet-62069544.pdf?src-supplier=TME, ComponentLink4URL=https://datasheet.octopart.com:443/0603WAF1501T5E-Royal-Ohm-datasheet-62069544.pdf?src-supplier=TME, Country of Origin=Thailand, Export Control Classification Number (ECCN) Code=EAR99, Harmonized Tariff Schedule (HTS) Code=8533.21.00.30, Height=450µm, Introduction Date=2013-06-17, Length=1.6mm, Lifecycle Status=Production, Manufacturer Part Number=0603WAF1501T5E, Mounting Technology="Surface Mount", Number of Terminals=2, Pricing="5000=0.001, 10000=0.001 (USD)", REACH SVHC=Unaffected, RoHS=Compliant, Supplier=Mouser, Width=800µm
R21: library part 0603WAF2002T5E, "100mW Thick Film Resistors 75V ±100ppm/℃ ±1% 20kΩ 0603 Chip Resistor - Surface Mount ROHS", Case/Package=0603, JLCPCB Part Number=C4184, Manufacturer="Royal Ohm", Max Operating Temperature=155°C, Min Operating Temperature=-55°C, Power Rating=100mW, Supplier Part Number=303-0603WAF2002T5E, Temperature Coefficient=100ppm/°C, Tolerance=1%, Working Voltage=75V, Category="Chip SMD Resistors", China RoHS=Non-Compliant, ComponentLink1Description=https://datasheet.octopart.com:443/0603WAF2002T5E-Royal-Electronics-datasheet-181080982.pdf?src-supplier=IHS, ComponentLink1URL=https://datasheet.octopart.com:443/0603WAF2002T5E-Royal-Electronics-datasheet-181080982.pdf?src-supplier=IHS, ComponentLink2Description=https://datasheet.octopart.com:443/0603WAF2002T5E-Royal-Ohm-datasheet-165785611.pdf?src-supplier=TME, ComponentLink2URL=https://datasheet.octopart.com:443/0603WAF2002T5E-Royal-Ohm-datasheet-165785611.pdf?src-supplier=TME, ComponentLink3Description=https://datasheet.octopart.com:443/0603WAF2002T5E-Royal-Ohm-datasheet-157855877.pdf?src-supplier=TME, ComponentLink3URL=https://datasheet.octopart.com:443/0603WAF2002T5E-Royal-Ohm-datasheet-157855877.pdf?src-supplier=TME, ComponentLink4Description=https://datasheet.octopart.com:443/0603WAF2002T5E-Royal-Ohm-datasheet-62069544.pdf?src-supplier=TME, ComponentLink4URL=https://datasheet.octopart.com:443/0603WAF2002T5E-Royal-Ohm-datasheet-62069544.pdf?src-supplier=TME, Country of Origin=Thailand, Export Control Classification Number (ECCN) Code=EAR99, Harmonized Tariff Schedule (HTS) Code=8533.21.00.30, Height=450µm, Introduction Date=2019-05-28, Length=1.6mm, Lifecycle Status=Production, Manufacturer Part Number=0603WAF2002T5E, Mounting Technology="Surface Mount", Number of Terminals=2, Pricing="10000=0.001 (USD)", REACH SVHC=Unaffected, RoHS=Compliant, Supplier=Mouser, Width=800µm
R22: library part 0603WAF3001T5E, "Thick Film Resistors - SMD RMC 0603 1/10W 1% T/R-5000", JLCPCB Part Number=C4211, Manufacturer="Royal Ohm", Supplier Part Number=303-0603WAF3001T5E, Category="Chip SMD Resistors", ComponentLink1Description=https://datasheet.octopart.com:443/0603WAF3001T5E-Royal-Ohm-datasheet-165785611.pdf?src-supplier=TME, ComponentLink1URL=https://datasheet.octopart.com:443/0603WAF3001T5E-Royal-Ohm-datasheet-165785611.pdf?src-supplier=TME, ComponentLink2Description=https://datasheet.octopart.com:443/0603WAF3001T5E-Royal-Ohm-datasheet-157855877.pdf?src-supplier=TME, ComponentLink2URL=https://datasheet.octopart.com:443/0603WAF3001T5E-Royal-Ohm-datasheet-157855877.pdf?src-supplier=TME, ComponentLink3Description=https://datasheet.octopart.com:443/0603WAF3001T5E-Royal-Ohm-datasheet-62069544.pdf?src-supplier=TME, ComponentLink3URL=https://datasheet.octopart.com:443/0603WAF3001T5E-Royal-Ohm-datasheet-62069544.pdf?src-supplier=TME, Manufacturer Part Number=0603WAF3001T5E, Pricing="10000=0.001 (USD)", Stock=20000, Supplier=Mouser
R23: library part 0603WAF8200T5E, "Thick Film Resistors - SMD RMC 0603 1/10W 1% T/R-5000", JLCPCB Part Number=C23253, Manufacturer="Royal Ohm", Supplier Part Number=303-0603WAF8200T5E, Category="Chip SMD Resistors", ComponentLink1Description=https://datasheet.octopart.com:443/0603WAF8200T5E-Royal-Ohm-datasheet-165785611.pdf?src-supplier=TME, ComponentLink1URL=https://datasheet.octopart.com:443/0603WAF8200T5E-Royal-Ohm-datasheet-165785611.pdf?src-supplier=TME, ComponentLink2Description=https://datasheet.octopart.com:443/0603WAF8200T5E-Royal-Ohm-datasheet-157855877.pdf?src-supplier=TME, ComponentLink2URL=https://datasheet.octopart.com:443/0603WAF8200T5E-Royal-Ohm-datasheet-157855877.pdf?src-supplier=TME, ComponentLink3Description=https://datasheet.octopart.com:443/0603WAF8200T5E-Royal-Ohm-datasheet-62069544.pdf?src-supplier=TME, ComponentLink3URL=https://datasheet.octopart.com:443/0603WAF8200T5E-Royal-Ohm-datasheet-62069544.pdf?src-supplier=TME, Manufacturer Part Number=0603WAF8200T5E, Pricing="10000=0.001 (USD)", Supplier=Mouser
R24: library part 0603WAF8201T5E, "Res Thick Film 0603 8.2K Ohm 1% 0.1W(1/10W) ±100ppm/C Pad SMD T/R", JLCPCB Part Number=C25981, Manufacturer="Royal Ohm", Supplier Part Number=303-0603WAF8201T5E, Category="Chip SMD Resistors", ComponentLink1Description=https://datasheet.octopart.com:443/0603WAF8201T5E-Royal-Ohm-datasheet-165785611.pdf?src-supplier=TME, ComponentLink1URL=https://datasheet.octopart.com:443/0603WAF8201T5E-Royal-Ohm-datasheet-165785611.pdf?src-supplier=TME, ComponentLink2Description=https://datasheet.octopart.com:443/0603WAF8201T5E-Royal-Ohm-datasheet-157855877.pdf?src-supplier=TME, ComponentLink2URL=https://datasheet.octopart.com:443/0603WAF8201T5E-Royal-Ohm-datasheet-157855877.pdf?src-supplier=TME, ComponentLink3Description=https://datasheet.octopart.com:443/0603WAF8201T5E-Royal-Ohm-datasheet-62069544.pdf?src-supplier=TME, ComponentLink3URL=https://datasheet.octopart.com:443/0603WAF8201T5E-Royal-Ohm-datasheet-62069544.pdf?src-supplier=TME, Manufacturer Part Number=0603WAF8201T5E, Pricing="10000=0.001 (USD)", Supplier=Mouser
R25: library part 0603WAF7501T5E, "Fixed Resistor, Metal Glaze/thick Film, 0.1W, 7500ohm, 75V, 1% +/-Tol, 100ppm/Cel, Surface Mount, 0603", Case/Package=0603, JLCPCB Part Number=C23234, Manufacturer="Royal Ohm", Max Operating Temperature=155°C, Min Operating Temperature=-55°C, Power Rating=100mW, Supplier Part Number=303-0603WAF7501T5E, Temperature Coefficient=100ppm/°C, Tolerance=1%, Working Voltage=75V, Category="Chip SMD Resistors", ComponentLink1Description=https://datasheet.octopart.com:443/0603WAF7501T5E-Royal-Electronics-datasheet-181080982.pdf?src-supplier=IHS, ComponentLink1URL=https://datasheet.octopart.com:443/0603WAF7501T5E-Royal-Electronics-datasheet-181080982.pdf?src-supplier=IHS, ComponentLink2Description=https://datasheet.octopart.com:443/0603WAF7501T5E-Royal-Ohm-datasheet-165785611.pdf?src-supplier=TME, ComponentLink2URL=https://datasheet.octopart.com:443/0603WAF7501T5E-Royal-Ohm-datasheet-165785611.pdf?src-supplier=TME, ComponentLink3Description=https://datasheet.octopart.com:443/0603WAF7501T5E-Royal-Ohm-datasheet-157855877.pdf?src-supplier=TME, ComponentLink3URL=https://datasheet.octopart.com:443/0603WAF7501T5E-Royal-Ohm-datasheet-157855877.pdf?src-supplier=TME, ComponentLink4Description=https://datasheet.octopart.com:443/0603WAF7501T5E-Royal-Ohm-datasheet-62069544.pdf?src-supplier=TME, ComponentLink4URL=https://datasheet.octopart.com:443/0603WAF7501T5E-Royal-Ohm-datasheet-62069544.pdf?src-supplier=TME, Height=450µm, Length=1.6mm, Lifecycle Status=Production, Manufacturer Part Number=0603WAF7501T5E, Mounting Technology="Surface Mount", Number of Terminals=2, Pricing="10000=0.001 (USD)", REACH SVHC=Unaffected, RoHS=Compliant, Supplier=Mouser, Width=800µm
R26: library part 0603WAF5601T5E, "Res Thick Film 0603 5.6K Ohm 1% 0.1W(1/10W) ±100ppm/C Pad SMD T/R", Case/Package=0603, JLCPCB Part Number=C23189, Manufacturer="Royal Ohm", Max Operating Temperature=155°C, Min Operating Temperature=-55°C, Power Rating=100mW, Supplier Part Number=303-0603WAF5601T5E, Temperature Coefficient=100ppm/°C, Tolerance=1%, Working Voltage=75V, Category="Chip SMD Resistors", China RoHS=Non-Compliant, ComponentLink1Description=https://datasheet.octopart.com:443/0603WAF5601T5E-Royal-Ohm-datasheet-157855877.pdf?src-supplier=IHS, ComponentLink1URL=https://datasheet.octopart.com:443/0603WAF5601T5E-Royal-Ohm-datasheet-157855877.pdf?src-supplier=IHS, ComponentLink2Description=https://datasheet.octopart.com:443/0603WAF5601T5E-Royal-Ohm-datasheet-165785611.pdf?src-supplier=TME, ComponentLink2URL=https://datasheet.octopart.com:443/0603WAF5601T5E-Royal-Ohm-datasheet-165785611.pdf?src-supplier=TME, ComponentLink3Description=https://datasheet.octopart.com:443/0603WAF5601T5E-Royal-Ohm-datasheet-62069544.pdf?src-supplier=TME, ComponentLink3URL=https://datasheet.octopart.com:443/0603WAF5601T5E-Royal-Ohm-datasheet-62069544.pdf?src-supplier=TME, Country of Origin=Thailand, Export Control Classification Number (ECCN) Code=EAR99, Harmonized Tariff Schedule (HTS) Code=8533.21.00.30, Introduction Date=2016-08-18, Lifecycle Status=Production, Manufacturer Part Number=0603WAF5601T5E, Mounting Technology="Surface Mount", Number of Terminals=2, Pricing="10000=0.001 (USD)", REACH SVHC=Unaffected, RoHS=Compliant, Supplier=Mouser
R27: library part 0603WAF3301T5E, "Fixed Resistor, Metal Glaze/thick Film, 0.1W, 3300ohm, 75V, 1% +/-Tol, 100ppm/Cel, Surface Mount, 0603", Case/Package=0603, JLCPCB Part Number=C22978, Manufacturer="Royal Ohm", Max Operating Temperature=155°C, Min Operating Temperature=-55°C, Power Rating=100mW, Supplier Part Number=303-0603WAF3301T5E, Temperature Coefficient=100ppm/°C, Tolerance=1%, Working Voltage=75V, Category="Chip SMD Resistors", China RoHS=Non-Compliant, ComponentLink1Description=https://datasheet.octopart.com:443/0603WAF3301T5E-Royal-Ohm-datasheet-157855877.pdf?src-supplier=IHS, ComponentLink1URL=https://datasheet.octopart.com:443/0603WAF3301T5E-Royal-Ohm-datasheet-157855877.pdf?src-supplier=IHS, ComponentLink2Description=https://datasheet.octopart.com:443/0603WAF3301T5E-Royal-Ohm-datasheet-165785611.pdf?src-supplier=TME, ComponentLink2URL=https://datasheet.octopart.com:443/0603WAF3301T5E-Royal-Ohm-datasheet-165785611.pdf?src-supplier=TME, ComponentLink3Description=https://datasheet.octopart.com:443/0603WAF3301T5E-Royal-Ohm-datasheet-62069544.pdf?src-supplier=TME, ComponentLink3URL=https://datasheet.octopart.com:443/0603WAF3301T5E-Royal-Ohm-datasheet-62069544.pdf?src-supplier=TME, Country of Origin=Thailand, Export Control Classification Number (ECCN) Code=EAR99, Harmonized Tariff Schedule (HTS) Code=8533.21.00.30, Introduction Date=2016-08-18, Lifecycle Status=Production, Manufacturer Part Number=0603WAF3301T5E, Mounting Technology="Surface Mount", Number of Terminals=2, Pricing="10000=0.001 (USD)", REACH SVHC=Unaffected, RoHS=Compliant, Supplier=Mouser
R29 R30: library part 0603WAF1001T5E, "Res Thick Film 0603 1K Ohm 1% 0.1W(1/10W) ±100ppm/C Pad SMD T/R", Case/Package=0603, JLCPCB Part Number=C21190, Manufacturer="Royal Ohm", Max Operating Temperature=155°C, Min Operating Temperature=-55°C, Power Rating=100mW, Supplier Part Number=303-0603WAF1001T5E, Temperature Coefficient=100ppm/°C, Tolerance=1%, Working Voltage=75V, Category="Chip SMD Resistors", China RoHS=Non-Compliant, ComponentLink1Description=https://datasheet.octopart.com:443/0603WAF1001T5E-Royal-Electronics-datasheet-181080982.pdf?src-supplier=IHS, ComponentLink1URL=https://datasheet.octopart.com:443/0603WAF1001T5E-Royal-Electronics-datasheet-181080982.pdf?src-supplier=IHS, ComponentLink2Description=https://datasheet.octopart.com:443/0603WAF1001T5E-Royal-Ohm-datasheet-165785611.pdf?src-supplier=TME, ComponentLink2URL=https://datasheet.octopart.com:443/0603WAF1001T5E-Royal-Ohm-datasheet-165785611.pdf?src-supplier=TME, ComponentLink3Description=https://datasheet.octopart.com:443/0603WAF1001T5E-Royal-Ohm-datasheet-157855877.pdf?src-supplier=TME, ComponentLink3URL=https://datasheet.octopart.com:443/0603WAF1001T5E-Royal-Ohm-datasheet-157855877.pdf?src-supplier=TME, ComponentLink4Description=https://datasheet.octopart.com:443/0603WAF1001T5E-Royal-Ohm-datasheet-62069544.pdf?src-supplier=TME, ComponentLink4URL=https://datasheet.octopart.com:443/0603WAF1001T5E-Royal-Ohm-datasheet-62069544.pdf?src-supplier=TME, Country of Origin=Thailand, Export Control Classification Number (ECCN) Code=EAR99, Harmonized Tariff Schedule (HTS) Code=8533.21.00.30, Height=450µm, Introduction Date=2006-01-09, Length=1.6mm, Lifecycle Status=Production, Manufacturer Part Number=0603WAF1001T5E, Mounting Technology="Surface Mount", Number of Terminals=2, Pricing="10000=0.001 (USD)", REACH SVHC=Unaffected, RoHS=Compliant, Stock=260000, Supplier=Mouser, Width=800µm
R33: library part 0603WAF2401T5E, "100mW Thick Film Resistors 75V ±100ppm/℃ ±1% 2.4kΩ 0603 Chip Resistor - Surface Mount ROHS", JLCPCB Part Number=C22940, Manufacturer="Royal Ohm", Supplier Part Number=303-0603WAF2401T5E, Category="Chip SMD Resistors", ComponentLink1Description=https://datasheet.octopart.com:443/0603WAF2401T5E-Royal-Ohm-datasheet-165785611.pdf?src-supplier=TME, ComponentLink1URL=https://datasheet.octopart.com:443/0603WAF2401T5E-Royal-Ohm-datasheet-165785611.pdf?src-supplier=TME, ComponentLink2Description=https://datasheet.octopart.com:443/0603WAF2401T5E-Royal-Ohm-datasheet-157855877.pdf?src-supplier=TME, ComponentLink2URL=https://datasheet.octopart.com:443/0603WAF2401T5E-Royal-Ohm-datasheet-157855877.pdf?src-supplier=TME, ComponentLink3Description=https://datasheet.octopart.com:443/0603WAF2401T5E-Royal-Ohm-datasheet-62069544.pdf?src-supplier=TME, ComponentLink3URL=https://datasheet.octopart.com:443/0603WAF2401T5E-Royal-Ohm-datasheet-62069544.pdf?src-supplier=TME, Manufacturer Part Number=0603WAF2401T5E, Pricing="10000=0.001 (USD)", Supplier=Mouser
R36: library part RC0603FR-0782RL, "SMD Chip Resistor, 82 Ohm, ¡À 1%, 100 mW, 0603 [1608 Metric], Thick Film, General Purpose", Case Code (Imperial)=0603, JLCPCB Part Number=C137676, Manufacturer="Yageo Group", Max Operating Temperature=155°C, Max Power Dissipation=100mW, Min Operating Temperature=-55°C, Temperature Coefficient=100ppm/°C, Tolerance=1%, Voltage Rating=75V, Voltage Rating (AC)=50V, Case Code (Metric)=0603, Case/Package=0603, Category="Chip SMD Resistors", China RoHS=Non-Compliant, ComponentLink1Description=https://datasheet.octopart.com:443/RC0603FR-0782RL-Yageo-datasheet-175887523.pdf?src-supplier=IHS, ComponentLink1URL=https://datasheet.octopart.com:443/RC0603FR-0782RL-Yageo-datasheet-175887523.pdf?src-supplier=IHS, ComponentLink2Description=https://datasheet.octopart.com:443/RC0603FR-0782RL-Yageo-datasheet-103092701.pdf?src-supplier=Upverter, ComponentLink2URL=https://datasheet.octopart.com:443/RC0603FR-0782RL-Yageo-datasheet-103092701.pdf?src-supplier=Upverter, ComponentLink3Description=https://datasheet.octopart.com:443/RC0603FR-0782RL-Yageo-Group-datasheet-190305687.pdf?src-supplier=Future+Electronics, ComponentLink3URL=https://datasheet.octopart.com:443/RC0603FR-0782RL-Yageo-Group-datasheet-190305687.pdf?src-supplier=Future+Electronics, ComponentLink4Description=https://datasheet.octopart.com:443/RC0603FR-0782RL-Yageo-datasheet-164759695.pdf?src-supplier=Future+Electronics, ComponentLink4URL=https://datasheet.octopart.com:443/RC0603FR-0782RL-Yageo-datasheet-164759695.pdf?src-supplier=Future+Electronics, ComponentLink5Description=https://datasheet.octopart.com:443/RC0603FR-0782RL-Yageo-datasheet-137700087.pdf?src-supplier=Future+Electronics, ComponentLink5URL=https://datasheet.octopart.com:443/RC0603FR-0782RL-Yageo-datasheet-137700087.pdf?src-supplier=Future+Electronics, ComponentLink6Description=https://datasheet.octopart.com:443/RC0603FR-0782RL-Yageo-datasheet-27584510.pdf?src-supplier=Future+Electronics, ComponentLink6URL=https://datasheet.octopart.com:443/RC0603FR-0782RL-Yageo-datasheet-27584510.pdf?src-supplier=Future+Electronics, ComponentLink7Description=https://datasheet.octopart.com:443/RC0603FR-0782RL-Yageo-datasheet-15599030.pdf?src-supplier=Future+Electronics, ComponentLink7URL=https://datasheet.octopart.com:443/RC0603FR-0782RL-Yageo-datasheet-15599030.pdf?src-supplier=Future+Electronics, ComponentLink8Description=https://datasheet.octopart.com:443/RC0603FR-0782RL-Yageo-datasheet-12596169.pdf?src-supplier=Future+Electronics, ComponentLink8URL=https://datasheet.octopart.com:443/RC0603FR-0782RL-Yageo-datasheet-12596169.pdf?src-supplier=Future+Electronics, ComponentLink9Description=https://datasheet.octopart.com:443/RC0603FR-0782RL-Yageo-datasheet-503470.pdf?src-supplier=Future+Electronics, ComponentLink9URL=https://datasheet.octopart.com:443/RC0603FR-0782RL-Yageo-datasheet-503470.pdf?src-supplier=Future+Electronics, ComponentLink10Description=https://datasheet.octopart.com:443/RC0603FR-0782RL-Yageo-datasheet-8328172.pdf?src-supplier=Newark, ComponentLink10URL=https://datasheet.octopart.com:443/RC0603FR-0782RL-Yageo-datasheet-8328172.pdf?src-supplier=Newark, ComponentLink11Description=https://datasheet.octopart.com:443/RC0603FR-0782RL-Yageo-datasheet-34211833.pdf?src-supplier=Newark, ComponentLink11URL=https://datasheet.octopart.com:443/RC0603FR-0782RL-Yageo-datasheet-34211833.pdf?src-supplier=Newark, ComponentLink12Description=https://datasheet.octopart.com:443/RC0603FR-0782RL-Yageo-datasheet-62067350.pdf?src-supplier=Newark, ComponentLink12URL=https://datasheet.octopart.com:443/RC0603FR-0782RL-Yageo-datasheet-62067350.pdf?src-supplier=Newark, ComponentLink13Description=https://datasheet.octopart.com:443/RC0603FR-0782RL-Yageo-Group-datasheet-189192902.pdf?src-supplier=LCSC, ComponentLink13URL=https://datasheet.octopart.com:443/RC0603FR-0782RL-Yageo-Group-datasheet-189192902.pdf?src-supplier=LCSC, ComponentLink14Description=https://datasheet.octopart.com:443/RC0603FR-0782RL-Yageo-datasheet-176638170.pdf?src-supplier=JRH+Electronics, ComponentLink14URL=https://datasheet.octopart.com:443/RC0603FR-0782RL-Yageo-datasheet-176638170.pdf?src-supplier=JRH+Electronics, ComponentLink15Description=https://datasheet.octopart.com:443/RC0603FR-0782RL-Yageo-datasheet-148775077.pdf?src-supplier=TME, ComponentLink15URL=https://datasheet.octopart.com:443/RC0603FR-0782RL-Yageo-datasheet-148775077.pdf?src-supplier=TME, ComponentLink16Description=https://datasheet.octopart.com/RC0603FR-0782RL-Yageo-datasheet-73766026.pdf, ComponentLink16URL=https://datasheet.octopart.com/RC0603FR-0782RL-Yageo-datasheet-73766026.pdf, ComponentLink17Description=https://datasheet.octopart.com:443/RC0603FR-0782RL-Yageo-datasheet-118562.pdf?src-supplier=DigiKey, ComponentLink17URL=https://datasheet.octopart.com:443/RC0603FR-0782RL-Yageo-datasheet-118562.pdf?src-supplier=DigiKey, ComponentLink18Description=http://sigma.octopart.com:80/conflict_mineral_statement/Yageo-company-3.pdf?src-supplier=Compliance+Statements, ComponentLink18URL=http://sigma.octopart.com:80/conflict_mineral_statement/Yageo-company-3.pdf?src-supplier=Compliance+Statements, ComponentLink19Description=http://sigma.octopart.com:80/rohs_statement/Yageo-company-2.pdf?src-supplier=Compliance+Statements, ComponentLink19URL=http://sigma.octopart.com:80/rohs_statement/Yageo-company-2.pdf?src-supplier=Compliance+Statements, Composition="Thick Film", Country of Origin="Mainland China, Taiwan", Depth=800µm, Export Control Classification Number (ECCN) Code=EAR99, Features="Moisture Resistant", Harmonized Tariff Schedule (HTS) Code=8533.21.00.30, Height=450µm, Introduction Date=2008-07-18, Lead Free="Lead Free", Length=1.6mm, Lifecycle Status=Production, Manufacturer Part Number=RC0603FR-0782RL, Mounting Technology="Surface Mount", Number of Terminals=2, Number of Terminations=2, Packaging="Tape & Reel", Pins=2, Power Rating=100mW, Pricing="5000=0.004, 15000=0.003, 25000=0.002 (USD)", REACH SVHC=Unaffected, RoHS=Compliant, Schedule B="8533210045, 8533210045|8533210045, 8533210045|8533210045|8533210045, 8533210045|8533210045|8533210045|8533210045", Stock=20000, Supplier=Newark, Supplier Part Number=RC0603FR-0782RL, Termination=SMD/SMT, Voltage Rating (DC)=50V, Width=800µm, Working Voltage=75V